# Allegro board ptsd.brd
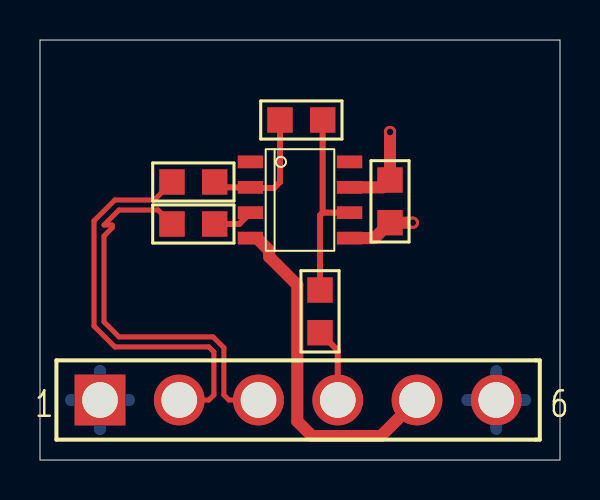
[diagram p0: board, top side]
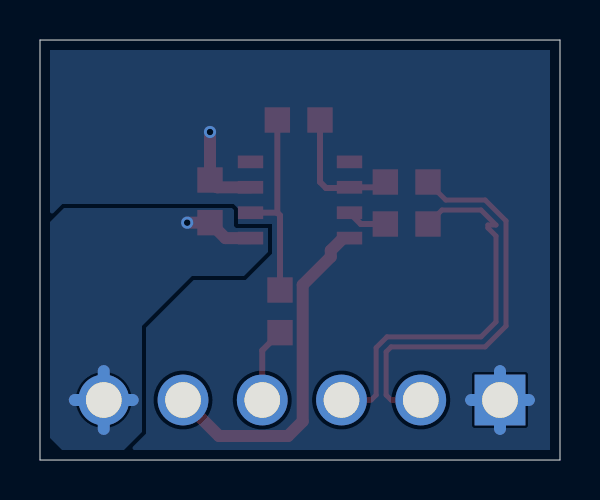
[diagram p1: board, bottom side, seen from below]

Outline 26 x 21 mm; copper layers: TOP, BOTTOM. Coordinates in mm from the lower left corner of the outline.
Outline path: 0,21 26,21 26,0 0,0 0,21

## Design rules (mm)
constraint set DEFAULT: min track width 0.3
net group DP_IN: nets IN+ IN-
net group POWER: nets -5V

## Placement (name value [footprint] x y rotation side)
C1  0.1uF  [SMR0805]  17.5 14 270 top
J1  HEADER 6  [BLKCON156VHTM1SQSW1566]  3 3 0 top
R1  10k  [SMR0805]  6.6 11.8 0 top
R2  10k  [SMR0805]  6.6 13.9 0 top
R3  10k  [SMR0805]  14 8.5 270 top
R4  10k  [SMR0805]  12 17 0 top
U1  LMC6681/SO  [SOIC8]  13 13 0 top

## Library data of the parts
C1 = C
J1 = HEADER 6
R1-R4 = R
U1 = LMC6681/SO: Tolerance: ***; User Part Number: ***

## Footprints (pads in the part's own frame, mm; a bottom-side part is the same pattern mirrored in y, then rotated)
BLKCON156VHTM1SQSW1566
  rect 2.54x2.54 hole 1.778: 1(0,0)
  round 2.54 hole 1.778: 2(3.962,0) 3(7.925,0) 4(11.887,0) 5(15.85,0) 6(19.812,0)
SMR0805
  rect 1.27x1.27 smd: 1(0,0) 2(2.134,0)
SOIC8
  rect 1.27x0.635 smd: 1(-2.477,1.905) 2(-2.477,0.635) 3(-2.477,-0.635) 4(-2.477,-1.905) 5(2.477,-1.905) 6(2.477,-0.635) 7(2.477,0.635) 8(2.477,1.905)

## Nets
-5V: J1.5 U1.4
GND: C1.2 J1.6 U1.5
VCC: C1.1 J1.1 U1.7(VCC+)
IN+: J1.3 R1.1
IN-: J1.2 R2.1
OUT: J1.4 R3.2
N00231: R2.2 R4.1 U1.2
N00235: R1.2 U1.3
N00341: R3.1 R4.2 U1.6

Pads without a net: U1 1 8

## Via types
v1: diameter 0.61, hole 0.33, TOP to BOTTOM, 2 vias

## Routing (per net, layer and track width the routed paths; a pad name or vN(x,y) marks a point on that pad's centre or on a via; arc(x,y) is an arc through that point)
-5V: length 17.4
  TOP w0.6: U1.4 10.84,11.1 11.46,10.48 11.46,10.16 12.87,8.75 12.87,1.94 13.6,1.2 17.05,1.2 J1.5
GND: length 9.3
  TOP w0.6: v1(18.64,11.87) C1.2 16.73,11.1 U1.5
  BOTTOM w0.6: 21.36,3 J1.6 ; J1.6 22.81,1.55 ; J1.6 22.81,4.45 ; J1.6 24.26,3
VCC: length 10.4
  TOP w0.6: v1(17.5,16.4) C1.1 17.14,13.63 U1.7
  BOTTOM w0.6: J1.1 4.45,3 ; J1.1 3,4.45 ; J1.1 3,1.55 ; J1.1 1.55,3
IN+: length 20.1
  TOP w0.25: R1.1 5.9,12.5 3.95,12.5 3.2,11.75 3.6,11.75 3.6,11.6 3.2,11.2 3.2,6.91 3.95,6.16 8.65,6.16 9.19,5.61 9.19,3.25 9.44,3 J1.3
IN-: length 20.5
  TOP w0.25: R2.1 6.6,13.89 5.71,13 3.74,13 2.7,11.96 2.7,6.7 3.74,5.66 8.44,5.66 8.69,5.41 8.69,3.25 8.44,3 J1.2
OUT: length 3.7
  TOP w0.3: R3.2 14.89,5.48 J1.4
N00231: length 6.6
  TOP w0.3: R4.1 12,13.9 11.7,13.6 10.56,13.6 U1.2 9,13.63 R2.2
N00235: length 2
  TOP w0.3: R1.2 9.96,11.8 U1.3
N00341: length 9.9
  TOP w0.3: U1.6 14.13,12.37 ; 14.13,12.37 14.13,12.37 R4.2 ; 14.13,12.37 14,12.23 R3.1

## Copper pours and planes (outline as drawn; the poured copper is in the pictures)
GND on BOTTOM: 21.8,0.5 24.9,0.5 25.5,1.1 25.5,11.9 24.8,12.6 16.4,12.6 16.3,12.5 16.3,11.7 16.2,11.6 14.6,11.6 14.6,10.4 15.8,9.2 18.4,9.2 20.9,6.7 20.9,1.4
VCC on BOTTOM: 0.5,0.5 0.5,20.5 25.5,20.5 25.5,0.5
